# EAGLE board SparkFun_RJ45 Breakout v11 (EAGLE 5.01)
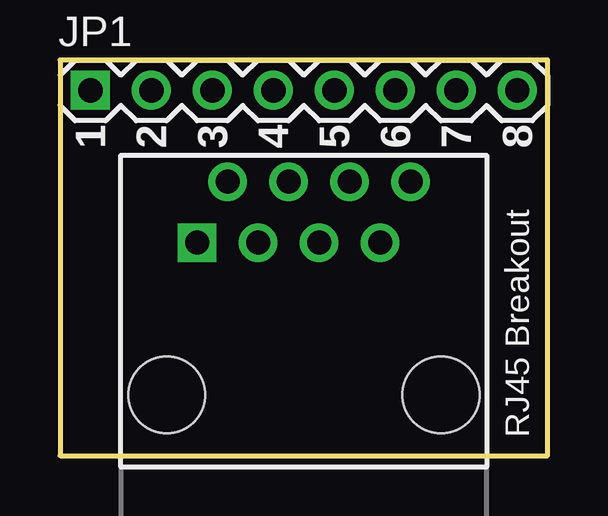
[diagram p0: board, top side]
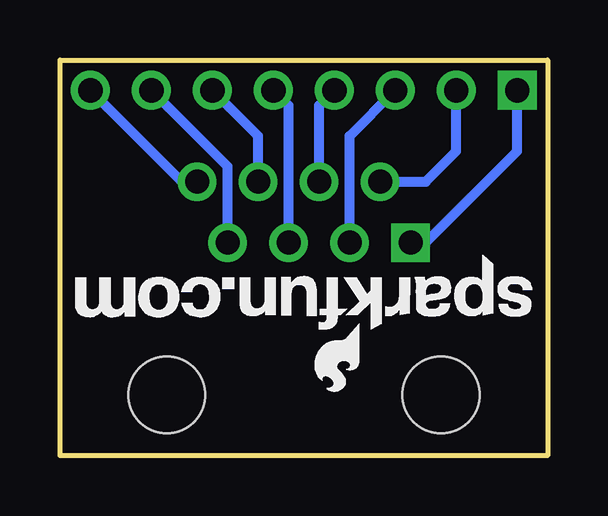
[diagram p1: board, bottom side, seen from below]

Size 20.32 x 16.51 mm. Coordinates in mm from the lower left corner, seen from the top.
Outline: 0,0 20.32,0 20.32,16.51 0,16.51 0,0
Copper layers (1*16): Top 0.035mm / dielectric 1.5mm / Bottom 0.035mm
Design rules "SparkFun": minimum track width 8mil, minimum drill 20mil, track to track 8mil, track to pad 8mil, pad to pad 8mil, via to via 8mil, smd to smd 8mil, copper to edge 10mil, drill to drill 8mil, minimum pad ring 12mil, minimum via ring 10mil, stop-mask expansion 4mil, vias tented up to drill 20mil, thermal gap 10mil

## Footprints (pad centres in the part's own frame; a part is rotated, then mirrored left to right if it is on the bottom)
1X08 = drill 1.016 square: 1 0,0 | drill 1.016 round: 2 2.54,0; 3 5.08,0; 4 7.62,0; 5 10.16,0; 6 12.7,0; 7 15.24,0; 8 17.78,0
RJ45-8 = drill 1 square: 1 -4.445,6.35 | drill 1 round: 2 -3.175,8.89; 3 -1.905,6.35; 4 -0.635,8.89; 5 0.635,6.35; 6 1.905,8.89; 7 3.175,6.35; 8 4.445,8.89 | hole 3.2: -5.715,0; 5.715,0

## Placement (x,y rotation side)
JP1  [1X08]  1.27,15.24 0 top
U1  RJ45  [RJ45-8]  10.16,2.54 0 top
U$2  [SFE-NEW-WEBLOGO]  0.64,8.38 180 bottom

## Library data of the parts
JP1 U1 U$2 = SparkFun

## Nets
N$1: JP1.1 U1.1
N$2: JP1.2 U1.2
N$3: JP1.3 U1.3
N$4: JP1.4 U1.4
N$5: JP1.5 U1.5
N$6: JP1.6 U1.6
N$7: JP1.7 U1.7
N$8: JP1.8 U1.8

## Tracks (layer width: path | path; a pad name or v marks a point on that pad's centre or on a via)
N$1
  Bottom 0.406: U1.1 5.08,8.89 1.27,12.7 JP1.1
N$2
  Bottom 0.406: U1.2 5.08,11.43 3.81,12.7 JP1.2
N$3
  Bottom 0.406: U1.3 8.26,13.34 JP1.3
N$4
  Bottom 0.406: U1.4 9.53,14.61 JP1.4
N$5
  Bottom 0.406: U1.5 10.79,14.61 JP1.5
N$6
  Bottom 0.406: U1.6 12.06,13.34 JP1.6
N$7
  Bottom 0.406: U1.7 13.34,12.06 JP1.7
N$8
  Bottom 0.406: U1.8 15.24,11.43 JP1.8

## Text on the board
tPlace: 1 | 2 | 3 | 4 | 5 | 6 | 7 | 8 | RJ45 Breakout